# Altium PCB 9100带功放(AD).PcbDoc
Units mil, origin at the board's own origin, x right, y up, seen from the top; angles counter-clockwise.
Board outline 730 x 850 mil, 2 copper layers (Top Layer, Bottom Layer); 19 components, 27 nets, 86 pads, 27 vias.
Unrouted connection lines stored in the file: 2.
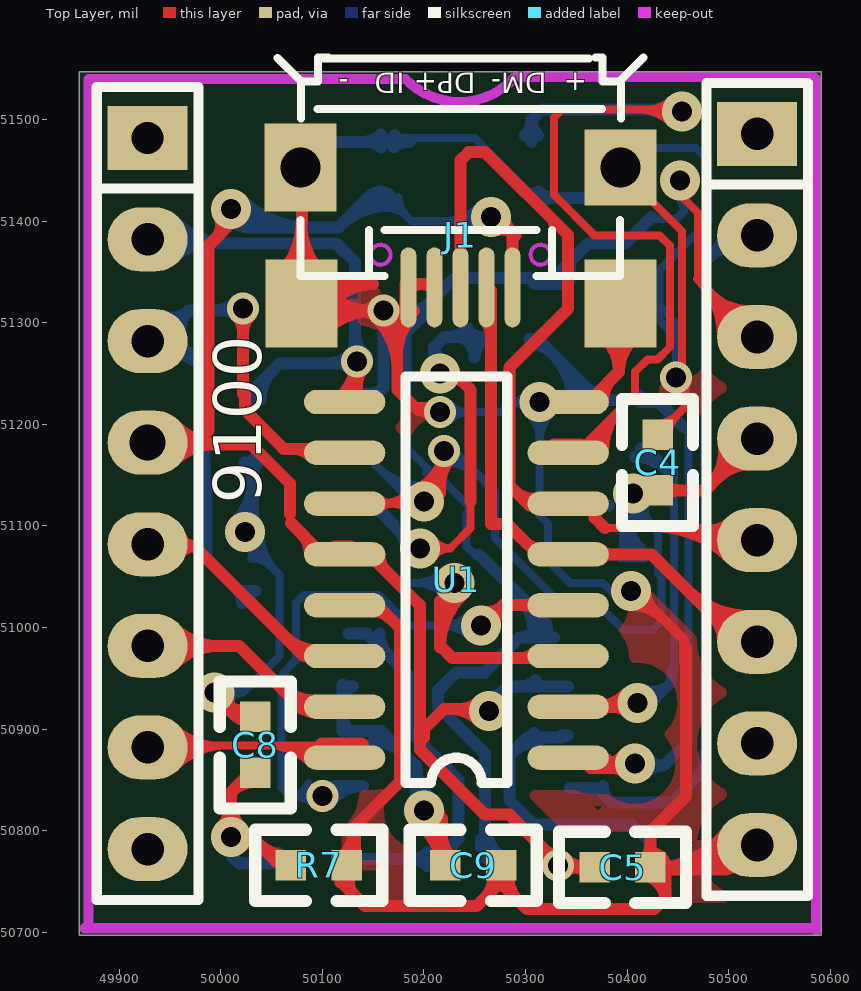
[diagram p0: Top Layer view]
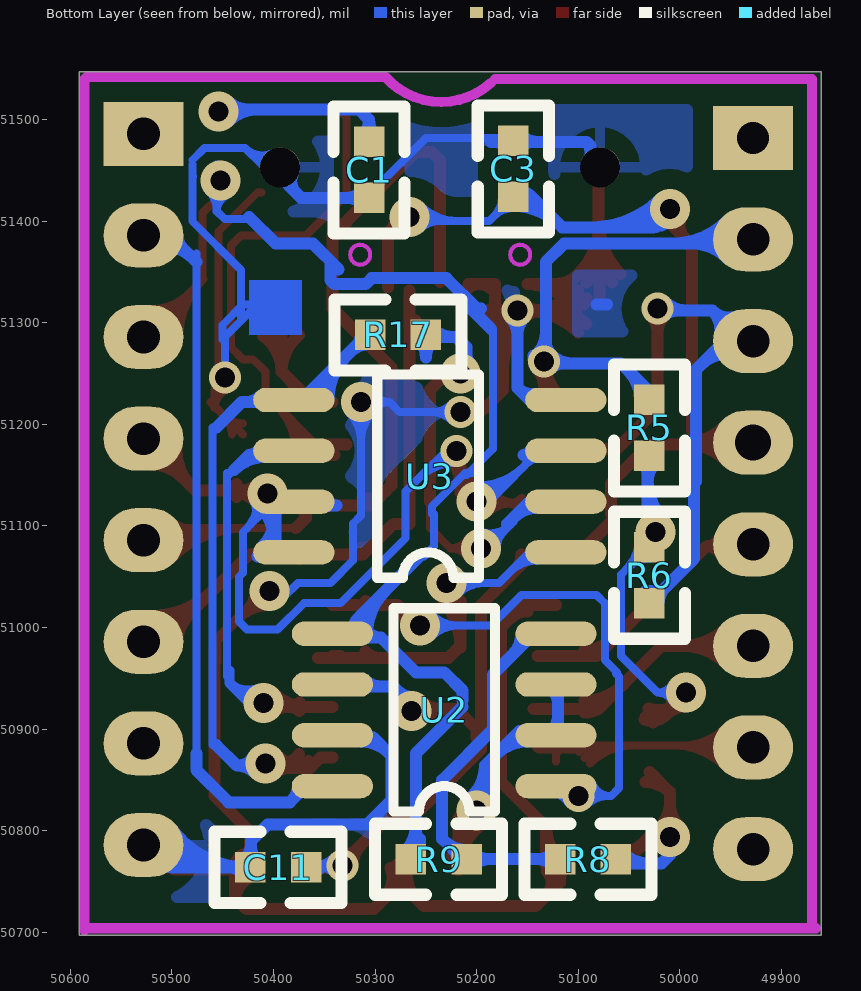
[diagram p1: Bottom Layer view, seen from below]

## Layer stack, top to bottom
Top Layer: signal copper 1.4
Dielectric: dielectric 12.6, FR-4, Dk 4.8
Bottom Layer: signal copper 1.4

## Board outline
49861,50697 50591,50697 50591,51547 49861,51547

## Design rules (kind name [scope] priority, off if disabled: settings)
Clearance [All] p1: gap=19.68
PolygonConnect [All] p1: connectstyle=Relief reliefconductorwidth=10 reliefentries=4 polygonreliefangle="90 Angle"
RoutingPriority [All] p1: routingpriority=4
RoutingVias [All] p1: holewidth=20 width=50 viastyle="Through Hole" minholewidth=28 minwidth=50 maxholewidth=28 maxwidth=50
SilkscreenOverComponentPads [All] p1: minsilkscreentomaskgap=10
SolderMaskExpansion [All] p1: expansion=4
Width [All] p1: maxlimit=78.74 minlimit=78.74 preferedwidth=10
26 further rules are at their usual default settings.

## Components (designator, comment, footprint, x,y, rotation, side; value= is the part's Value field where it differs from the comment)
C1 "105" 0603 50306,51478 r270 bottom
C3 "105" 0603 50164,51424 r90 bottom
C4 "104" 0603 50430,51190 r270 top
C5 "106" 0603 50368,50764 r0 top
C8 "105" 0603 50034,50912 r270 top
C9 "105" 0603 50276,50766 r180 top
C11 "104" 0603 50423,50764 r180 bottom
J1 "USB" USB-ANZUO 50236,51386 r0 top
R5 "4K7" 0603 50030,51224 r270 bottom
R6 "4K7" 0603 50030,51024 r90 bottom
R7 "10K" 0603 50124,50766 r180 top
R8 "4K7" 0603 50118,50772 r180 bottom
R9 "22k" 0603 50210,50772 r0 bottom
R17 "100R" 0603 50250,51288 r0 bottom
U1 "" SO-16 50342,50872 r180 top
U2 "8002" SO-8 50122,50844 r0 bottom
U3 "25q32" SOP8S 50380,51224 r180 bottom
? "" SIP8#1 49928,51482 r270 top locked
? "" SIP8#2 50528,51486 r270 top locked

## Footprints (in the part's own frame and the unit in brackets; to place one, negate y for a bottom-side part, rotate by r counter-clockwise, add the part's x,y. Pads: shape width x height; smd on the part's side, far side on the other; paste and mask are expansions set on the pad)
0603 [mil]
  rect 30x30 smd: 1(0,0) 2(55,0)
  silkscreen extent -35,-35 90,35
SIP8#1 [mm]
  rect 1.6x2 hole 0.8: 9(0,0)
  oval 1.6x2 hole 0.813: 10(2.54,0) 11(5.08,0) 13(10.16,0) 14(12.7,0) 15(15.24,0) 16(17.78,0)
  oval 1.6x2 hole 0.9: 12(7.62,0)
  silkscreen extent -1.27,-1.27 19.05,1.27
SIP8#2 [mm]
  oval 1.6x2 hole 0.813: 1(17.78,0) 2(15.24,0) 3(12.7,0) 4(10.16,0) 5(7.62,0) 6(5.08,0) 7(2.54,0)
  rect 1.6x2 hole 0.813: 8(0,0)
  silkscreen extent -1.27,-1.27 19.05,1.27
SO-8 [mil]
  oval 80x24 smd: 1(0,0) 2(0,-50) 3(0,-100) 4(0,-150) 5(220,-150) 6(220,-100) 7(220,-50) 8(220,0)
  silkscreen extent 60,-175 160,25
SO-16 [mil]
  oval 80x24 smd: 1(0,0) 2(0,-50) 3(0,-100) 4(0,-150) 5(0,-200) 6(0,-250) 7(0,-300) 8(0,-350) 9(220,-350) 10(220,-300) 11(220,-250) 12(220,-200) 13(220,-150) 14(220,-100) 15(220,-50) 16(220,0)
  silkscreen extent 60,-375 160,25
SOP8S [mil]
  round 39.37 on Bottom Overlay: 0(153.54,-124.02)
  oval 80x24 smd: 1(267.72,-150) 2(267.72,-100) 3(267.72,-50) 4(267.72,0) 5(0,0) 6(0,-50) 7(0,-100) 8(0,-150)
  silkscreen extent 82,-175 182,25
USB-ANZUO [mm]
  rect 1.8x2.2 smd: 0(-4,1.702) 0(-3.981,-1.702) 0(3.995,-1.702)
  rect 1.8x1.9 smd: 0(4,1.702)
  round 1 hole 1: 1(-4,1.702) 2(4,1.702)
  oval 0.4x2 smd: 1(-1.3,-1.298) 2(-0.65,-1.298) 3(0,-1.298) 4(0.65,-1.298) 5(1.3,-1.298)
  Keep-Out Layer circle w0.102: c2,-0.483 r0.25
  Keep-Out Layer circle w0.102: c-2,-0.483 r0.25
  silkscreen extent -4.57,-1.01 4.57,4.45

## Via types
v1: diameter 39.37, hole 19.68, Top Layer to Bottom Layer, 19 vias
v2: diameter 31.5, hole 19.68, Top Layer to Bottom Layer, 8 vias

## Nets (pads, with @x,y where several pads share a name; then routed paths per layer and width w, separated by ;. In a path a pad name is that pad's centre, name@x,y a point inside that pad or via, vN(x,y) a via of type N, cw(c..) or ccw(c..) an arc to the next point about the centre after c; other vN are vias at no path point)
AGND: 
DACL: ?.10 R5.1 U1.9 | length 955.7
  Top Layer w11.81: U1.9@50117.69,51226.31 ccw(c50078.32,51265.68) v2@50134,51265.68 ; U1.9@50118,51222 50134,51238 ; U1.9 U1.9@50130,51222 ; U1.9@50122,51228 U1.9@50126,51228 ; U1.9@50126.04,51217.96 ccw(c50106.83,51237.17) 50134,51237.17 ; v2@50127.04,51255.04 cw(c50110.24,51238.24) 50134,51238.24 cw(c50157.76,51238.24) v2@50140.96,51255.04 ; U1.9@50128.08,51222.37 cw(c50148.38,51223.62) 50134,51238 ; v2@50134,51270 50134,51238
  Bottom Layer w11.81: ?.10@49926,51378 50114,51378 50132,51360 50132,51268 v2@50126,51262 ; ?.10@49945.62,51391.74 ccw(c49978.8,51424.92) 49978.8,51378 ; ?.10@49953.97,51363.9 cw(c49988,51329.88) 49988,51378 ; ?.10@49953.97,51400.09 ccw(c50007.31,51453.44) 50007.31,51378 ; R5.1 50030,51232 50058,51260 50140,51260 50144,51264 v2@50144,51268 ; R5.1@50032,51224 R5.1@50036,51224 ; R5.1@50039.1,51224 cw(c50080.36,51224) 50051.18,51253.18 ; 50105.41,51260 ccw(c50105.41,51290.59) v2@50127.04,51268.96 ; 50115.07,51260 cw(c50115.07,51243.07) v2@50127.04,51255.04 ; v2@50132,51264 50132,51298 ; v2@50127.04,51268.96 ccw(c50115.07,51280.93) 50132,51280.93 cw(c50115.07,51280.93) v2@50127.04,51268.96 ; 50132,51290.59 ccw(c50162.59,51290.59) 50140.96,51268.96 cw(c50162.59,51290.59) 50132,51290.59
  other v2: 50134,51262
DACR: ?.11 R6.1 U1.10 | length 827.5
  Top Layer w11.81: v2@50015.04,51307.04 cw(c49998.24,51290.24) 50022,51290.24 cw(c50045.76,51290.24) v2@50028.96,51307.04 ; v2@50020,51308 50022,51306 50022,51230 ; 50024,51230 50024,51214 50062,51176 U1.10@50122,51176 ; 50069.63,51176 cw(c50069.63,51147.63) U1.10@50089.69,51167.69
  Bottom Layer w11.81: ?.11 49938,51282 49968,51312 ; ?.11@49939.59,51268.73 cw(c49950.7,51229.13) 49979.79,51258.21 ; ?.11@49943.92,51306.29 ccw(c49951.33,51328.66) 49968,51312 ; ?.11@49956,51282 49984,51254 49984,51144 ; ?.11@49960.86,51287.53 cw(c49986.74,51293.25) 49968,51312 ; 49986,51144 49986,51068 50018,51036 R6.1@50034,51036 ; 49993.41,51312 ccw(c49993.41,51342.59) v2@50015.04,51320.96 ; 50003.07,51312 cw(c50003.07,51295.07) v2@50015.04,51307.04 ; 50014.47,51039.52 ccw(c50030,51055.05) R6.1@50030,51033.09 ; 50014.47,51039.53 cw(c49998.95,51024) R6.1@50020.9,51024 ; v2@50020,51312 49968,51312
  other v2: 50022,51314
GND: ?.1 C1.2 C3.2 C4.1 C5.2 C9.1 C11.1 J1.0@50078.52,51453 J1.0@50079.28,51319 J1.0@50393.28,51319 J1.1 J1.2 R7.1 U1.8 U1.13 U2.7 U3.4 | length 5844.9
  Top Layer w7.87: v2@50206.15,51205.47 ccw(c50194,51197.42) 50194,51212 ; v2@50206.15,51218.53 cw(c50194,51226.58) 50194,51212 ; v2(50216,51212) 50194,51212 ; C4.1 50462,51222 ; C4.1@50430,51201.06 ccw(c50430,51227.77) 50448.89,51208.89 ccw(c50467.77,51190) C4.1@50441.06,51190 ; v2@50444.42,51234.74 cw(c50438.53,51216.24) 50457.95,51216.24 ; v2@50446.81,51242.25 cw(c50441.96,51227.01) 50457.95,51227.01 ; v2(50448,51246) 50448,51244 50457.95,51234.05 50457.95,51217.95 ; v2@50454,51242 50454,51278
  Top Layer w10: v1@50404,51021.31 cw(c50404,50976.21) 50435.9,51008.1 ; v1@50412,51032 50456,50988 50456,50966 ; v1@50418.69,51036 ccw(c50444.48,51036) 50426.24,51017.76
  Top Layer w11.81: J1.0@50058.48,51347.84 ccw(c50008.96,51397.76) 50079.28,51397.76 ; J1.0@50066.8,51339.46 ccw(c50037.09,51369.41) 50079.28,51369.41 ccw(c50121.46,51369.41) J1.0@50091.75,51339.46 ; J1.0@50079.28,51319 50079.28,51397.76 ; 50080,51398 J1.0@50080,51432 ; J1.0@50091.8,51298.6 cw(c50124.15,51266.26) 50124.15,51312 ; J1.0@50091.8,51323.66 ccw(c50119.95,51351.8) 50119.95,51312 ; J1.0@50094.58,51317.96 cw(c50129.45,51297.65) 50129.45,51338 ; J1.0@50100.07,51347.84 cw(c50149.59,51397.76) 50079.28,51397.76 ; J1.0@50100.16,51290.25 cw(c50152.66,51237.74) v2@50152.66,51312 ; J1.0@50100.15,51332.01 ccw(c50148.46,51380.31) v2@50148.46,51312 ; J1.0@50100.15,51347.76 ccw(c50123.71,51371.31) 50123.71,51338 ; J1.0@50101.44,51346.39 ccw(c50120,51362.72) 50120,51338 ; J1.0@50104.79,51312.02 cw(c50150,51285.68) 50150,51338 50120,51338 ; J1.0@50107.51,51319.76 ccw(c50118,51322.96) 50118,51312 ; J1.0@50107.96,51304.12 cw(c50118,51301.66) 50118,51312 ; J1.0@50108.8,51326.82 cw(c50120,51326.8) 50120,51338 ; R7.1@50117.97,50772.8 ccw(c50090.32,50804) 50132,50804 ; 50118,50748.91 cw(c50126.12,50748.91) R7.1@50125.12,50756.97 ; R7.1@50118,50772 50118,50750 50142,50726 50252,50726 50272,50746 50272,50758 C9.1@50270,50760 ; R7.1@50122.02,50767.86 ccw(c50133.68,50756.93) 50122.38,50745.62 ; U1.13 50154,51022 50176.32,50999.68 50176.32,50848.32 50132,50804 ; R7.1@50130.63,50759.78 ccw(c50142.58,50748.58) 50131,50737 ; R7.1@50132,50766 50132,50804 ; U1.13@50150,51015.91 cw(c50150,50991.54) 50167.23,51008.77 ; v2@50153.04,51318.96 cw(c50136.24,51335.76) 50136.24,51312 cw(c50136.24,51288.24) 50153.04,51305.04 cw(c50102.44,51254.44) 50174,51254.44 ; v2(50160,51312) 50118,51312 ; v2@50161.39,51313.39 cw(c50130.95,51282.95) 50174,51282.95 ; 50174,51272.52 cw(c50215.69,51272.52) J1.1@50186.21,51302 ; 50174,51301.03 cw(c50187.18,51301.03) J1.1@50177.86,51310.35 ; 50176.21,51310.21 cw(c50184.08,51302.34) J1.1@50190.49,51311.43 ; J1.1@50186.21,51333.49 cw(c50197.09,51322.61) 50197.09,51338 ; 50198.14,51338 cw(c50198.14,51322.61) J1.2@50209.02,51333.49 ; v2@50207.48,51207.07 ccw(c50192,51198.12) 50192,51216 ; J1.2@50208,51338 50182,51338 50182,51316 50174,51308 50174,51234 50192,51216 ; v2@50210,51216 50192,51216 ; 50260,50734 ccw(c50239.26,50754.74) C9.1@50267.3,50763.33 ; C9.1@50269.85,50759.29 cw(c50261.22,50749.88) 50274,50749.88 cw(c50282.17,50749.88) C9.1@50279.25,50757.51 ; 50272,50745.6 cw(c50285.33,50745.6) C9.1@50279.78,50757.73 ; C9.1@50273.42,50766.84 ccw(c50293.48,50760.35) 50278.57,50745.43 ; 50273.89,50747.89 ccw(c50260.52,50761.26) C9.1@50278.6,50766.8 ; C9.1@50274,50764 50274,50750 50301.22,50722.78 50426.78,50722.78 50438,50734 50438,50766 ; C9.1@50284.65,50763.2 ccw(c50314.11,50753.67) 50292.22,50731.78 ; U1.8 50362,51222 U1.8@50364,51224 ; U1.8@50368,51228 50392,51252 ; J1.0@50374.72,51288.16 cw(c50345.5,51251.99) 50392,51251.99 ; U1.8@50376.09,51222 cw(c50410.12,51222) 50386.06,51246.06 ; 50392,51274.67 cw(c50418.79,51274.67) J1.0@50403.43,51296.61 ; J1.0@50392,51316 50392,51252 ; J1.0@50393.28,51319 J1.0@50417,51319 ; J1.0@50410.2,51286.93 ccw(c50434.65,51251.99) 50392,51251.99 ; C5.2@50416.57,50770.43 ccw(c50401.04,50785.96) 50423,50785.96 ccw(c50444.96,50785.96) 50429.43,50770.43 ccw(c50449.78,50790.78) 50449.78,50762 ; C5.2@50419,50770 C5.2@50422,50770 ; C5.2@50420.1,50755.38 cw(c50411.7,50730.46) 50438,50730.46 ; C5.2 50423,50799 50458,50834 50458,50980 ; C5.2@50423.87,50766.57 cw(c50417.24,50746.9) 50438,50746.9 ; C5.2@50427.64,50777.77 cw(c50422.78,50763.34) C5.2@50438,50763.34 ; C5.2@50429.43,50757.57 cw(c50440.13,50746.87) 50440.13,50762 ; 50445.37,50762 ccw(c50445.37,50841.06) ?.1@50509.03,50794.17 ; 50468.74,50762 ccw(c50468.74,50823.85) ?.1@50518.54,50787.17 ; 50492.11,50762 ccw(c50492.11,50806.63) ?.1@50528.05,50780.16 ; ?.1@50499.52,50801.18 cw(c50422,50858.28) 50422,50762 50498,50762 50514,50778 50520,50778 ?.1 ; ?.1@50526,50784 ?.1@50526,50788 ; 50118,51312 50108,51302 50102,51302 50102,51320 50120,51338
  Bottom Layer w7.87: C3.2@50160,51478 50164,51482 50250,51482 50302.57,51429.43 C1.2@50312.43,51429.43 ; v2@50222,51212 50276,51212 50286,51222 ; v2@50224.35,51203.65 cw(c50244.51,51183.49) 50244.51,51212 cw(c50244.51,51240.51) v2@50224.35,51220.35 ; v1@50300.54,51213.82 ccw(c50286,51204.98) 50286,51222 ; v1@50300.54,51230.18 cw(c50286,51239.02) 50286,51222 ; v1@50302.86,51210.86 cw(c50275.98,51183.98) 50314,51183.98 cw(c50352.02,51183.98) v1@50325.14,51210.86 ; J1.2@50392,51456 50412,51456 50428,51472 ; J1.2@50396.86,51460.11 ccw(c50405.65,51478.57) 50420.11,51464.11 ; J1.2@50400.25,51467.22 ccw(c50410.74,51489.26) 50428,51472 ; v1@50404,51030 50390,51030 50376,51044 50344,51044 50322,51066 50322,51102.28 50314,51110.28 v1(50314,51222) 50286,51222 ; v2@50448,51250 50448,51272 ; 50480,51442 50480,51456 ; 50480,51460 50468,51472 50428,51472
  Bottom Layer w11.81: 50072,51318 50082,51318 ; 50088,51474 50092,51478 ; J1.1@50090.11,51460.44 cw(c50101.95,51468.05) 50092,51478 ; U3.4@50100,51220 U3.4@50136,51220 ; U3.4@50118,51222 50146,51222 50160,51236 ; 50139.63,51478 ccw(c50139.63,51503.37) C3.2@50157.57,51485.43 ; U3.4@50141.29,51230.01 ccw(c50144.83,51251.17) 50160,51236 ; 50144.46,51478 cw(c50144.46,51459.46) C3.2@50157.57,51472.57 ; v2@50153.04,51305.04 cw(c50136.24,51288.24) 50160,51288.24 cw(c50183.76,51288.24) v2@50166.96,51305.04 ; v2@50158,51312 50160,51310 50160,51236 ; C3.2@50170.43,51472.57 cw(c50183.54,51459.46) 50183.54,51478 ; C3.2@50170.89,51484.93 ccw(c50186,51497.92) 50186,51478 50092,51478 ; 50286.53,50876.52 cw(c50314,50849.05) U2.7@50314,50887.9 ; 50297,50887 cw(c50305.08,50878.92) U2.7@50310.9,50888.75 ; C1.2 50373,51423 50398,51448 J1.2@50398,51456 ; U2.7@50308.35,50896.28 cw(c50302,50898.85) 50302,50892 ; C1.2@50312.43,51416.57 cw(c50327.96,51401.04) 50327.96,51423 cw(c50327.96,51444.96) C1.2@50312.43,51429.43 ; U2.7@50336,50892 50302,50892 ; U2.7@50336,50894 U2.7 ; 50377.76,51427.76 ccw(c50365.79,51439.73) J1.2@50381.05,51447.04 ; C11.1@50416.57,50770.43 ccw(c50403.46,50783.54) 50422,50783.54 ; C11.1@50422,50766 50422,50790 50406,50806 50308,50806 50284,50830 50284,50874 50302,50892 ; 50422,50788.37 ccw(c50447.37,50788.37) 50429.43,50770.43 ccw(c50444.96,50785.96) 50444.96,50764 ccw(c50444.96,50742.04) C11.1@50429.43,50757.57 ; 50449.36,50764 ccw(c50449.36,50838.08) ?.1@50509.03,50794.17 ; 50472.72,50764 ccw(c50472.72,50820.89) ?.1@50518.54,50787.17 ; 50496.08,50764 ccw(c50496.08,50803.7) ?.1@50528.05,50780.17 ; ?.1@50499.52,50801.17 cw(c50426,50855.28) 50426,50764 50500,50764 50520,50784 ?.1@50520,50788
  other v1: 50404,51036
MCU_1LINE: ?.15 U1.16 | length 548.5
  Top Layer w7.87: ?.15@49930,50884 50114,50884 50122,50876 U1.16@50122,50868 ; ?.15@49944.23,50873.65 cw(c49969.22,50848.66) 49969.22,50884 ; ?.15@49949.79,50868.08 cw(c49988.23,50829.65) 49988.23,50884 ; ?.15@49949.79,50895.92 ccw(c49978.57,50924.69) 49978.57,50884 ; ?.15@49955.36,50862.51 cw(c50007.24,50810.64) 50007.24,50884 ; ?.15@49955.36,50901.49 ccw(c49997.58,50943.7) 49997.58,50884 ; 50045.56,50884 cw(c50045.56,50823.56) U1.16@50088.3,50866.3 ; 50064.57,50884 cw(c50064.57,50842.57) U1.16@50093.87,50871.87 ; 50083.58,50884 cw(c50083.58,50861.58) U1.16@50099.43,50877.43 ; U1.16@50102.59,50884 cw(c50102.59,50880.59) U1.16@50105,50883
  Top Layer w15.75: 50100,50884 50138,50884
MUTE: U1.4 U2.1 | length 805.8
  Top Layer w11.81: v1@50258.2,51015.6 ccw(c50261.85,51038.15) 50278,51022 ; v1@50264,51008 50278,51022 ; v1@50269.78,51002.05 cw(c50297.84,51002.15) 50278,51022 ; U1.4@50309.69,51017.69 ccw(c50299.29,51007.29) 50299.29,51022 ccw(c50299.29,51036.71) U1.4@50309.69,51026.31 ; U1.4 50278,51022
  Bottom Layer w7.87: 50062,50956 50074,50968 50074,51024 50082,51032 50156,51032 50186,51002 v1@50254,51002 ; 50063.14,50954.86 50060,50951.73 50060,50842 50068,50834 ; 50079.33,50834 ccw(c50079.33,50849.46) U2.1@50093.82,50844.07 ; U2.1@50086.44,50846.81 cw(c50068,50853.68) 50068,50834 ; v2@50091.65,50825.65 ccw(c50071.49,50805.49) 50071.49,50834 ccw(c50071.49,50862.51) U2.1@50091.65,50842.35 ; v2(50100,50834) 50068,50834 ; v1@50244.86,50990.86 ccw(c50217.98,50963.98) 50217.98,51002 ccw(c50217.98,51040.02) v1@50244.86,51013.14
  Bottom Layer w11.81: U2.1@50098.43,50835.19 cw(c50116.19,50821.7) U2.1@50116.19,50844 ; v2@50107.84,50828.05 cw(c50140,50803.61) 50140,50844 U2.1@50116,50844
  other v1: 50256,51002
NetC1_1: 
NetC9_2: C9.2 U2.2 U2.3 | length 544
  Top Layer w11.81: v1@50192.45,50808.47 cw(c50161.46,50761.18) C9.2@50218,50761.18 ; v1@50198.92,50818.35 cw(c50175.78,50783.04) 50218,50783.04 ; v1(50200,50820) 50210,50820 50218,50812 C9.2@50218,50764 ; v1@50205.39,50828.23 cw(c50190.11,50804.9) 50218,50804.9 ; C9.2@50214.57,50772.43 ccw(c50206.29,50780.71) C9.2@50218,50780.71 ; 50218,50795.2 ccw(c50250.2,50795.2) C9.2@50227.43,50772.43
  Bottom Layer w11.81: U2.2@50120,50898 U2.3@50120,50944 ; 50120,50913.54 ccw(c50141.54,50913.54) U2.2@50126.31,50898.31 ; 50120,50924.46 cw(c50141.54,50924.46) U2.3@50126.31,50939.69 ; U2.3@50120,50942 U2.3@50130,50942 ; U2.2@50128,50898 50158,50898 50192,50864 ; U2.2@50150,50887.9 cw(c50150,50844.22) 50180.89,50875.11 ; v1@50192,50824 50192,50864 ; 50192,50840.14 ccw(c50215.36,50840.14) v1@50201.19,50821.56 ; v1@50198,50822 v1(50200,50820) v1@50210,50820 ; v1@50208.36,50830.96 cw(c50233.55,50864) 50192,50864
NetR5_2: C8.1 R5.2 R6.2 | length 770.2
  Top Layer w11.81: v1@49990,50936 49992,50936 50016,50912 ; v1@49994,50922.22 cw(c49994,50893.78) 50014.11,50913.89 ; v1@50001,50927 ccw(c50020.95,50946.95) C8.1@50030.82,50920.52 ; v1@50007.67,50934.31 ccw(c50033.15,50931.15) 50015,50913 ; 50013.99,50914.01 ccw(c50028.01,50928.03) C8.1@50034.95,50909.46 ; C8.1@50026.68,50906.6 ccw(c50016,50898.74) 50016,50912 ; C8.1@50026.68,50917.4 cw(c50016,50925.26) 50016,50912 ; C8.1 50016,50912
  Bottom Layer w7.87: v1(49994,50936) 50022,50936 ; v1@50007.46,50927.82 cw(c50022,50918.98) 50022,50936 ; v1@50007.46,50944.18 ccw(c50022,50953.02) 50022,50936 ; R6.2@50024,51078.25 cw(c50024,51059.55) R6.2@50037.23,51072.77 ; R6.2@50026,51084 50058,51052 50058,50972 50022,50936 ; R6.2@50028,51084 R6.2@50028,51086 ; R6.2@50030,51067.94 cw(c50030,51038.81) 50050.59,51059.41 ; R6.2@50031.86,51093.59 ccw(c50064.85,51091.86) R6.2@50041.49,51068.51 ; R6.2@50039.73,51093.18 ccw(c50088.61,51090.62) 50054,51056 ; R6.2@50041.06,51079 ccw(c50065.36,51079) 50048.18,51061.82
  Bottom Layer w11.81: v1@50014.26,51103.74 ccw(c49971.42,51146.58) 50032,51146.58 ; v1@50022.61,51095.39 ccw(c49999.93,51118.07) 50032,51118.07 ; R6.2@50023.57,51085.43 ccw(c50003.21,51105.78) v1@50032,51105.78 ; R5.2@50023.57,51162.57 cw(c50003.21,51142.21) 50032,51142.21 ; R6.2@50032,51076 R6.2@50034,51074 ; R6.2@50032,51086 R5.2@50032,51166 ; v1@50032,51096.13 ccw(c50047.13,51096.13) R6.2@50036.43,51085.43 ; 50032,51151.87 cw(c50047.13,51151.87) R5.2@50036.43,51162.57
  other v1: 50024,51094
NetR8_1: R8.1 R9.1 U2.4 | length 514.8
  Bottom Layer w11.81: R8.1 50214,50772 50234.01,50792.01 50234.01,50849.83 50184,50899.84 50184,50954 50144,50994 U2.4@50126,50994 ; R8.1@50124.43,50765.57 cw(c50139.96,50750.04) 50139.96,50772 cw(c50139.96,50793.96) R8.1@50124.43,50778.43 ; U2.4@50156.1,50994 ccw(c50185.29,50994) 50164.65,50973.35 ; R9.1@50203.57,50765.57 ccw(c50188.04,50750.04) 50188.04,50772 ccw(c50188.04,50793.96) R9.1@50203.57,50778.43 ; R9.1@50204,50766 50204,50770 R9.1@50206,50772 ; R9.1@50210,50781.1 ccw(c50210,50812.71) 50232.35,50790.35 ; R9.1@50219.09,50772 cw(c50231.39,50772) R9.1@50222.7,50780.7
NetR8_2: C8.2 R7.2 R8.2 | length 421.2
  Top Layer w11.81: v1@50000.26,50803.74 ccw(c49976.73,50827.27) 50010,50827.27 ccw(c50043.27,50827.27) v1@50019.74,50803.74 ; 50009.94,50837.94 cw(c50034,50813.88) C8.2@50034,50847.9 ; v1@50010,50788 50010,50838 C8.2@50030,50858 ; v1@50010.11,50792.03 cw(c50012.79,50746.02) 50045.39,50778.61 ; v1@50011.37,50792.59 cw(c50021.39,50782.31) 50031.54,50792.46 ; v1@50019.62,50784.13 cw(c50029.74,50773.74) 50040,50784 ; 50030,50794 50054,50770 R7.2@50062,50770 ; 50035.5,50788.5 ccw(c50067.89,50820.89) R7.2@50068.82,50775.09
  Bottom Layer w11.81: v1(50010,50794) 50010,50776 50018,50768 R8.2@50062,50768 ; 50031.39,50768 ccw(c50031.39,50803.61) R8.2@50056.57,50778.43
NetR9_2: 
NetU2_8: 
SPI_CLK: U1.2 U3.6 | length 544
  Top Layer w11.81: U1.2 v1@50392,50922 ; U1.2@50367.08,50922 ccw(c50367.08,50968.92) v1@50400.26,50935.74 ; U1.2@50374.31,50917.69 cw(c50384.71,50907.29) 50384.71,50922 cw(c50384.71,50936.71) U1.2@50374.31,50926.31 ; 50386.39,50922 cw(c50386.39,50902.39) v1@50400.26,50916.26
  Bottom Layer w7.87: 50436.63,51157.37 50446,51148 ; 50446,50952 50446,51152
  Bottom Layer w10: v1(50410,50926) 50424,50926 50443.5,50945.5 ; v1@50411.72,50930.36 ccw(c50418.89,50948.55) 50432.72,50934.72 ; v1@50415.39,50939.66 ccw(c50424.99,50964.01) 50443.5,50945.5 ; 50443.5,50957.5 50443.5,50945.5
  Bottom Layer w11.81: U3.6@50408,51167.9 cw(c50408,51124.22) 50438.89,51155.11 ; U3.6@50410.14,51168.29 cw(c50416.74,51150.74) 50430,51164 ; U3.6@50412,51170 50424,51170 ; U3.6@50413.5,51176.62 ccw(c50424,51181.63) 50424,51170 ; 50436.63,51157.37 50424,51170
SPI_CS: U1.3 U3.1 | length 593.5
  Top Layer w7.87: v1@50232,51042 v1@50232,51044
  Top Layer w11.81: 50216,50980.44 cw(c50288.82,50980.44) v1@50239.36,51033.89 ; 50216,51007.46 cw(c50263.81,51007.46) v1@50231.34,51042.55 ; v1@50218.71,51036.1 cw(c50213.53,51032.47) 50218,51028 cw(c50224.78,51021.22) v1@50226.92,51030.57 ; v1@50232,51042 50216,51026 50216,50982 50228,50970 U1.3@50356,50970 ; 50294.46,50970 ccw(c50294.46,50991.54) U1.3@50309.69,50976.31 ; U1.3@50334,50972 U1.3
  Bottom Layer w7.87: U3.1@50116,51074 50148,51074 50178,51044 v1@50236,51044 ; U3.1@50140.28,51065.94 cw(c50140.28,51027.84) 50167.22,51054.78 ; U3.1@50140.28,51073.81 cw(c50140.28,51054.73) 50153.78,51068.22 ; v1@50218.86,51032.86 ccw(c50191.98,51005.98) 50191.98,51044 ccw(c50191.98,51082.02) v1@50218.86,51055.14
  other v1: 50230,51044
SPI_DI: R17.1 U3.2 | length 711.8
  Top Layer w7.87: v1(50196,51078) 50226,51078 ; v1@50208.96,51069.06 cw(c50226,51057.3) 50226,51078 ; v1@50208.96,51086.94 ccw(c50226,51098.7) 50226,51078 ; 50246,51124 50246,51098 50226,51078
  Top Layer w11.81: v1@50214,51246 v1@50218,51242 ; v1(50216,51250) 50230,51250 50246,51234 50246,51160 ; v1@50216.45,51248.08 cw(c50221.76,51225.69) 50238.04,51241.96 ; 50246,51124 50246,51156
  Bottom Layer w7.87: 50164,51108 50164,51104 50188,51080 v1@50210,51080 ; 50167,51101 ccw(c50186.84,51120.84) v1@50192.71,51093.4 ; 50173.36,51094.64 cw(c50156.72,51078) v1@50180.25,51078 ; 50177.24,51090.76 ccw(c50190.45,51103.96) v1@50194.35,51085.7
  Bottom Layer w11.81: U3.2@50110,51126 U3.2@50128,51126 ; U3.2@50126,51122 50150,51122 50170,51102 ; U3.2@50140.28,51117.9 cw(c50140.28,51084.56) 50163.86,51108.14 ; v1@50206.26,51259.74 ccw(c50197.22,51268.78) 50210,51268.78 ; v1@50210,51252 50210,51276 ; v1@50219.68,51263.28 cw(c50223.2,51276) 50210,51276 ; 50223.21,51286 ccw(c50223.21,51314.78) R17.1@50243.57,51294.43 ; 50232.87,51286 cw(c50232.87,51270.87) 50243.57,51281.57 cw(c50228.04,51266.04) 50250,51266.04 cw(c50271.96,51266.04) R17.1@50256.43,51281.57 ; 50250,51266 R17.1 ; R17.1@50258,51286 50220,51286 50210,51276
SPI_DO: R17.2 U1.1 U3.5 | length 880.3
  Top Layer w11.81: U1.1 50354,50872 50364,50862 50402,50862 cw(c50402,50895.76) U1.1@50374.89,50875.63 ; U1.1@50365.08,50862 ccw(c50365.08,50908.92) v1@50398.26,50875.74 ; U1.1@50365.41,50868.59 ccw(c50378.52,50878.32) 50378.52,50862 ; 50384.39,50862 cw(c50384.39,50842.39) v1@50398.26,50856.26
  Bottom Layer w7.87: 50460.32,50884.32 50460.32,51196.86
  Bottom Layer w11.81: R17.2@50304,51284 50312,51284 50372,51224 U3.5@50386,51224 ; R17.2@50305,51278.9 cw(c50305,51249.71) 50325.65,51270.35 ; R17.2@50314.09,51288 ccw(c50328.81,51288) R17.2@50318.4,51277.6 ; 50327.45,51268.55 cw(c50282.91,51224) U3.5@50345.9,51224 ; 50347.62,51248.38 cw(c50323.23,51224) U3.5@50357.72,51224 ; U3.5@50367.78,51228.22 cw(c50363.56,51224) U3.5@50369.53,51224 ; U3.5@50388,51224 U3.5@50404,51224 ; v1@50410,50864 50436,50864 ; U3.5@50412,51222 50431.17,51222 50456.32,51196.86 ; U3.5@50412.31,51228.31 ccw(c50427.54,51243.54) 50427.54,51222 ; v1@50417.85,50856.36 cw(c50436,50838.61) 50436,50864 ; v1@50419.79,50873.14 ccw(c50436,50882.95) 50436,50864 ; 50456.32,50884.32 50436,50864
  other v1: 50408,50866
SPK1: ?.7 U2.8 | length 787.5
  Bottom Layer w7.87: 50476,50878 50476,51368
  Bottom Layer w11.81: U2.8@50344,50842 50370,50842 50384,50828 50444.16,50828 50476,50859.84 50476,50875.86 ; U2.8@50376.1,50844 ccw(c50395.64,50844) 50381.82,50830.18 ; 50476,51360 50502,51386 ?.7 ; 50480.51,51364.51 cw(c50504.99,51340.03) ?.7@50515.82,51372.91 ; 50489.26,51373.26 ccw(c50476.51,51386) ?.7@50494.54,51386
SPK2: ?.6 R9.2 U2.5 | length 1785.5
  Top Layer w7.87: v1@50452,51450 v1@50452,51456 ; v1@50454,51450 50454,51424 50470,51408 50470,51342 50518,51294 ?.6@50534,51294 ; 50468.93,51343.07 cw(c50411.85,51286) ?.6@50492.57,51286 ; 50482.37,51329.63 cw(c50438.74,51286) ?.6@50500.44,51286 ; 50483.11,51328.89 ccw(c50520.12,51365.91) ?.6@50520.12,51313.56 ; 50495.81,51316.19 cw(c50465.62,51286) ?.6@50508.31,51286 ; 50496.55,51315.45 ccw(c50520.12,51339.03) ?.6@50520.12,51305.69
  Top Layer w11.81: ?.6@50500,51290 ?.6@50532,51290
  Bottom Layer w7.87: 50184,51194 50184,51294 ; 50184,51200 50184,51176 50210,51150 ; 50202,51152 50211.4,51152 50244,51119.4 50244,51112 ; 50242,51112 50242,51080 50252,51070 ; 50424,51402 50448,51402 50456,51410 v1@50456,51456 ; v1@50445.66,51425.58 cw(c50438.68,51409.74) 50456,51409.74 ; 50456,51411.64 cw(c50480.36,51411.64) v1@50463.14,51428.86
  Bottom Layer w11.81: 50186,51294 50206,51314 50196,51314 ; 50200,51314 50230,51344 50303.39,51344 50309.39,51338 50340,51338 50344,51342 50344,51360.67 ; 50214,50922 50260,50876 50260,50792 ccw(c50272.14,50792) R9.2@50268.06,50780.57 ; 50214,50928 50214,50938 50232,50956 50260,50956 50294,50990 ; 50254,51072 50316,51010 ; 50260,50806.03 ccw(c50299.03,50806.03) R9.2@50271.43,50778.43 ; R9.2@50262,50772 50262,50778 50256,50784 50256,50792 ccw(c50267,50792) R9.2@50265.91,50781.05 ; 50290.87,51035.13 cw(c50249.74,50994) U2.5@50307.9,50994 ; 50307,51019 cw(c50295.04,51007.04) U2.5@50308.98,50997.45 ; U2.5@50309.1,50997.62 cw(c50294,51008.76) 50294,50990 ; U2.5@50310.39,50998.91 ccw(c50302.24,51010) 50316,51010 ; 50311.03,51014.97 cw(c50290.06,50994) U2.5@50319.72,50994 ; U2.5@50316,51000 50316,51010 ; 50317.04,51008.96 cw(c50306.94,50998.86) U2.5@50318.71,50990.76 ; U2.5@50328,50990 50294,50990 ; 50336,51352.67 50361.33,51378 50398,51378 50424,51404
  other v1: 50452,51440
UART_RX: ?.14 U1.15 | length 462.9
  Top Layer w11.81: ?.14 50018,50982 50080,50920 ; ?.14@49945.62,50972.26 cw(c49969.14,50948.73) 49969.14,50982 cw(c49969.14,51015.27) ?.14@49945.62,50991.74 ; ?.14@49953.97,50963.9 cw(c49997.65,50920.22) 49997.65,50982 cw(c49997.65,51043.78) ?.14@49953.97,51000.09 ; 50056.28,50943.72 ccw(c50094,50981.43) U1.15@50094,50928.1 ; 50076.45,50923.56 ccw(c50094,50941.11) U1.15@50094,50916.28 ; U1.15@50088.72,50925.04 cw(c50080,50930.06) 50080,50920 ; U1.15@50144,50920 50080,50920
UART_TX: ?.13 U1.14 | length 338.1
  Top Layer w11.81: ?.13@49926,51080 49974,51080 ; ?.13@49934,51080 ?.13@49934,51088 ; ?.13@49958.77,51070.58 cw(c49974,51062.99) 49974,51080 ; ?.13@49960.18,51090 ccw(c49974,51094.54) 49974,51080 ; 50063.11,50990.89 ccw(c50094,51021.78) U1.14@50094,50978.09 ; U1.14@50140,50972 50082,50972 49974,51080
USB_DM: ?.3 J1.4 U1.5 | length 782.4
  Top Layer w11.81: J1.4@50260.2,51302 cw(c50246.19,51287.99) 50266,51287.99 ; J1.4@50266,51331.59 50266,51102 50282,51102 50312,51072 50424,51072 50502,50994 ?.3@50532,50994 ; 50300.18,51083.82 ccw(c50314,51097.64) U1.5@50314,51078.1 ; U1.5@50374.31,51067.69 cw(c50384.71,51057.29) 50384.71,51072 cw(c50384.71,51086.71) U1.5@50374.31,51076.31 ; 50459.15,51036.85 ccw(c50520.12,51097.82) ?.3@50520.12,51011.59 ; 50479.32,51016.68 ccw(c50520.12,51057.49) ?.3@50520.12,50999.78 ; 50483.6,51012.4 cw(c50457.2,50986) ?.3@50494.53,50986 ; ?.3@50500,50986 ?.3@50534,50986 ; ?.3@50522,50992 50526,50988 ?.3@50528,50988 ; ?.3@50538,50988 ?.3@50542,50988
USB_DP: ?.4 J1.3 U1.6 | length 1123.8
  Top Layer w7.87: 50378.22,51097.78 ?.4@50500.22,51097.78 ; 50425.15,51097.78 cw(c50425.15,50991.03) ?.4@50500.64,51066.51 ; 50444.16,51097.78 cw(c50444.16,51010.04) ?.4@50506.21,51072.08 ; 50463.17,51097.78 cw(c50463.17,51029.05) ?.4@50511.77,51077.65 ; 50482.03,51097.78 ccw(c50482.03,51124.1) ?.4@50500.64,51105.49 ; 50482.18,51097.78 cw(c50482.18,51048.06) ?.4@50517.34,51083.22
  Top Layer w11.81: J1.3@50236,51340 50236,51460 50244,51468 50260.16,51468 50342,51386.16 50342,51314 50284,51256 50284,51140 50304,51120 50364,51120 U1.6@50368,51116 ; 50290,51134 ccw(c50306.56,51150.56) U1.6@50312.46,51127.9 ; 50328,51398 50328,51400.16 ; 50368,51107.86 cw(c50378.31,51107.86) U1.6@50373.09,51116.74 ; U1.6@50368,51118 50368,51108 50378.22,51097.78 ; ?.4@50500.22,51097.78 50516,51082 ?.4@50526,51082 ; ?.4@50520,51090 ?.4@50534,51090
V3.3: ?.5 C4.2 U1.11 U3.3 U3.7 U3.8 | length 2059.7
  Top Layer w7.87: U1.11@50124,51122 50198,51122 v1(50200,51124) ; U1.11@50155.7,51116.3 cw(c50169.46,51102.53) 50169.46,51122 cw(c50169.46,51141.46) U1.11@50155.7,51127.7 ; U1.11@50157.15,51122 ccw(c50157.15,51166.85) v1@50188.86,51135.14 ; 50166.81,51122 cw(c50166.81,51090.81) v1@50188.86,51112.86 ; 50176.16,51122 ccw(c50176.16,51147.84) v1@50194.43,51129.57 ; v1@50193.59,51138.38 ccw(c50176.82,51176) 50218,51176 50218,51132 50210,51124 v1(50200,51124) ; v1@50196.79,51131.19 ccw(c50182.22,51163.87) v2@50218,51163.87 ; v1@50203.21,51116.81 ccw(c50193.04,51139.6) 50218,51139.6 ; v2@50211.65,51165.65 cw(c50196.31,51150.31) 50218,51150.31 ; 50218,51140.66 cw(c50253.34,51140.66) v2@50228.35,51165.65 ; 50218,51151.73 cw(c50187.63,51151.73) v1(50200,51124) ; v1@50410.53,51132 cw(c50410.53,51115.53) C4.2@50422.18,51127.18 ; C4.2@50420.35,51140.41 cw(c50406,51148.45) v1(50406,51132) C4.2@50426,51132 ; C4.2@50421.31,51128.31 cw(c50426,51127.17) C4.2@50426,51132 ; C4.2@50421.31,51135.69 ccw(c50426,51136.82) C4.2@50426,51132
  Top Layer w11.81: C4.2@50415.74,51122.26 cw(c50446.51,51091.49) 50446.51,51135 ; C4.2@50415.74,51141.74 ccw(c50432.02,51158.02) C4.2@50432.02,51135 ; C4.2@50416.3,51141.15 ccw(c50430,51153.32) C4.2 ; C4.2@50418.94,51127.27 cw(c50430,51123.23) C4.2 ; C4.2@50436.43,51128.57 cw(c50451.96,51113.04) 50451.96,51135 cw(c50451.96,51156.96) C4.2@50436.43,51141.43 ; 50480.94,51138.94 ccw(c50445.81,51174.06) ?.5@50494.86,51181.94 ; 50489.88,51147.88 cw(c50520.12,51117.64) ?.5@50520.12,51160.41 ; 50497.28,51155.29 ccw(c50473.98,51178.59) ?.5@50506.52,51183.81 ; ?.5@50522,51182 50522,51180 50477,51135 C4.2
  Bottom Layer w7.87: U3.3@50120,51172 50140,51172 50184,51128 v1@50204,51128 ; U3.3@50140.28,51165.94 cw(c50140.28,51151.99) 50150.15,51161.85 ; U3.3@50148.35,51174 ccw(c50173.33,51174) 50155.66,51156.34 ; 50152.63,51159.37 ccw(c50200,51206.74) v1@50200,51139.75 ; 50166.07,51145.93 ccw(c50200,51179.85) v1@50200,51131.87 ; 50179.52,51132.49 ccw(c50200,51152.97) v1(50200,51124) ; v2@50220,51162.19 cw(c50220,51109.53) 50257.23,51146.77 ; v2@50220,51170.06 cw(c50220,51136.42) 50243.79,51160.21 ; v2@50220,51178 50226,51178 50270,51134 50270,51088 50334,51024 50370,51024 50396,50998 50426,50998 50434,51006 50434,51050 50430.25,51053.75 50430.25,51093.75 50406,51118 U3.7@50406,51124 ; U3.7@50408.19,51123.99 ccw(c50426.29,51123.32) 50413.48,51110.52 ; U3.7@50412.91,51128.23 ccw(c50427.76,51120.15) 50415.81,51108.19 ; U3.7@50416.06,51123.7 ccw(c50450.92,51122.42) 50426.25,51097.75 ; U3.7@50419.83,51124.47 ccw(c50437.4,51114.89) 50423.25,51100.75
  Bottom Layer w11.81: U3.3@50136,51170 50154,51170 cw(c50154,51178.27) U3.3@50146.1,51175.81 ; U3.7@50346.22,51125.92 cw(c50338,51128.66) 50338,51120 U3.7@50382,51120 ; U3.8@50394,51070 U3.8@50416,51070 ; U3.8@50398,51072 U3.7@50398,51120 ; U3.8@50398,51079.42 cw(c50458.58,51079.42) U3.7@50415.74,51122.26 ; U3.8@50398,51084.34 ccw(c50418.34,51084.34) U3.8@50403.96,51069.96 ; U3.8@50398,51085.14 cw(c50446.86,51085.14) U3.7@50412.31,51119.69 ; 50398,51107.93 cw(c50430.07,51107.93) U3.7@50407.39,51130.61 ; U3.7@50398,51112.86 ccw(c50446.86,51112.86) U3.8@50412.31,51078.31 ; U3.7@50398,51113.66 cw(c50418.34,51113.66) U3.7@50403.96,51128.04 ; U3.8@50400,51076 U3.8@50412,51076 ; U3.7@50408,51122 U3.7@50408,51128
  other v2: 50220,51174
VCC: ?.12 C3.1 C5.1 C11.2 J1.5 U1.12 U2.6 | length 2670.6
  Top Layer w7.87: 50068,51126 50068,51104 50072,51100
  Top Layer w11.81: ?.12@49928,51180 50030,51180 50068,51142 50068,51112 ; ?.12@49934,51184 49978,51184 ; ?.12@49945.62,51191.74 ccw(c49973.97,51220.1) 49973.97,51180 ; ?.12@49953.97,51163.9 cw(c49992.83,51125.05) 49992.83,51180 ; ?.12@49953.97,51200.1 ccw(c50002.48,51248.61) 50002.48,51180 ; ?.12@49957.69,51195.37 ccw(c49978,51207.81) 49978,51184 ; ?.12@49959.33,51171.77 cw(c49978,51163.64) 49978,51184 ; 49995,51383 ccw(c49981.92,51396.08) v1@49998.01,51405.2 ; v1@50016,51410 50012,51406 50012,51400 49988,51376 49988,51194 49978,51184 ; 50069.12,51102.88 50098,51074 50144,51074 50196,51022 50196,50880 50260,50816 50284,50816 50336,50764 C5.1 ; 50079.35,51092.65 cw(c50058.71,51072) U1.12@50087.9,51072 ; U1.12@50112,51080 U1.12@50128,51080 ; U1.12@50156.09,51072 ccw(c50180.46,51072) 50163.23,51054.77 ; 50200,50892 50200,50900 50220,50920 v1@50272,50920 ; 50225.9,50920 cw(c50225.9,50879.9) v1@50254.26,50908.26 ; 50235.56,50920 ccw(c50235.56,50946.44) v1@50254.26,50927.74 ; v1@50260,51400 50276,51400 50287.18,51388.82 J1.5 ; v1@50270.04,51390.83 cw(c50275.95,51371.59) 50290.18,51385.82 ; v1@50279.78,51404 ccw(c50298.56,51404) 50285.28,51390.72 ; 50313.78,50786.22 cw(c50293.57,50766) v2@50322.16,50766 ; 50318.61,50781.39 ccw(c50332,50794.78) v2@50332,50775.84 ; v2@50338.96,50759.04 cw(c50350.93,50747.07) 50350.93,50764 ; v2@50338.96,50772.96 ccw(c50360.59,50794.59) C5.1@50360.59,50764 ; C5.1@50361.57,50757.57 ccw(c50346.04,50742.04) 50346.04,50764 ccw(c50346.04,50785.96) C5.1@50361.57,50770.43
  Bottom Layer w7.87: C3.1@50164,51412.94 cw(c50164,51386.23) 50182.89,51405.11 cw(c50201.77,51424) C3.1@50175.06,51424 ; C3.1 C3.1@50166,51424 ; C3.1@50166,51420 50168,51420 50188,51400 50266,51400 v1@50268,51402 ; 50218.32,51400 ccw(c50218.32,51451.68) v1@50254.86,51415.14 ; 50237.33,51400 ccw(c50237.33,51432.67) v1@50260.43,51409.57 ; 50237.64,51400 cw(c50237.64,51375.64) v1@50254.86,51392.86 ; v2(50332,50766) 50366,50766 C11.2@50370,50762 ; v2@50336.46,50766 cw(c50336.46,50732.46) C11.2@50360.18,50756.18 ; v2@50340.35,50757.65 cw(c50360.51,50737.49) 50360.51,50766 cw(c50360.51,50794.51) v2@50340.35,50774.35 ; v2@50346.12,50766 ccw(c50346.12,50785.88) C11.2@50360.18,50771.82
  Bottom Layer w11.81: v1@50003.04,51405.04 ccw(c50029.69,51431.69) 50029.69,51394 ; v1@50006,51414 50026,51394 50116,51394 50146,51424 ; v1@50011.39,51413.39 ccw(c50058.21,51460.21) 50058.21,51394 ; v1@50012.94,51398.54 cw(c50015.73,51385.73) 50025,51395 cw(c50032.54,51402.54) v1@50022.71,51406.67 ; v1@50019.74,51421.74 ccw(c50086.72,51488.72) 50086.72,51394 ; 50117.75,51395.75 cw(c50164,51349.49) C3.1@50164,51414.9 ; 50137,51415 cw(c50148.78,51403.22) C3.1@50158.63,51416.66 ; 50137.91,51415.91 cw(c50164,51389.82) C3.1@50164,51426.71 ; 50146.74,51424.74 cw(c50157.02,51414.46) C3.1@50165.6,51426.19 ; C3.1@50156.68,51418.6 ccw(c50146,51410.74) 50146,51424 ; C3.1@50156.68,51429.4 cw(c50146,51437.26) 50146,51424 ; C3.1 50146,51424 ; v1@50264,50931.78 ccw(c50264,50950.56) 50277.28,50937.28 ; v1@50266,50920 50266,50926 50282,50942 ; v1@50277.14,50922.14 cw(c50295.93,50928.07) 50282,50942 ; 50294.46,50942 ccw(c50294.46,50963.54) U2.6@50309.69,50948.31 ; U2.6@50342,50942 50282,50942
  other v1: 50264,50918 50266,51404 50010,51412
VCOM: C1.1 U1.7 | length 1091.3
  Top Layer w7.87: U1.7@50354,51176 50408,51230 50408,51252 50420,51264 50430,51264 50442,51276 50442,51376 50432,51386 50368,51386 50328,51426 50328,51502 50336,51510 v1@50450,51510 ; U1.7@50354.44,51172 cw(c50365.16,51172) U1.7@50357.58,51179.58 ; U1.7@50362,51176 U1.7@50362,51180 ; U1.7@50362.32,51172 cw(c50392.05,51172) 50371.02,51193.02 ; U1.7@50370.19,51172 cw(c50418.93,51172) 50384.46,51206.46 ; U1.7@50378.06,51172 cw(c50445.81,51172) 50397.91,51219.91 ; 50411.15,51510 cw(c50411.15,51465.15) v1@50442.86,51496.86 ; 50420.81,51510 ccw(c50420.81,51541.19) v1@50442.86,51519.14 ; 50430.16,51510 cw(c50430.16,51484.16) v1@50448.43,51502.43
  Top Layer w11.81: U1.7@50328,51180 U1.7@50354,51180 ; U1.7@50340,51170 U1.7@50360,51170
  Bottom Layer w11.81: C1.1@50299.57,51484.43 ccw(c50284.04,51499.96) 50306,51499.96 ccw(c50327.96,51499.96) C1.1@50312.43,51484.43 ; C1.1 50306,51500 50316,51510 50450,51510 v1@50452,51508 ; 50415.9,51510 cw(c50415.9,51469.9) v1@50444.26,51498.26 ; 50425.56,51510 ccw(c50425.56,51536.44) v1@50444.26,51517.74
  other v1: 50454,51508
VDD: 
pads on no net: ?.2 ?.8 ?.9 ?.16 J1.0@50393.48,51453 U3.0
copper on no net: | length 536
  Top Layer w7.87: 50412,51428 50416,51428 50454,51390 50454,51268.85
  Top Layer w11.81: 50080,51417.44 50080,51456
  Bottom Layer w7.87: 50432,51304 50432,51352 50480,51400 50480,51443.3 50479.26,51444.03 ; 50448,51269.62 50448,51286 50416,51318 50396,51318 50430,51318 50450,51298 50450,51283.64

## Polygon pours and split planes (outlines as drawn)
GND on Top Layer "Top Layer-GND" (hatched 90Degree grid 8.19 track 11.93, remove dead copper, pour order 1000): 0,0
GND on Top Layer "Top Layer-GND 1" (hatched 90Degree grid 8.19 track 11.93, remove dead copper, pour order 1001): 0,0
GND on Top Layer "Top Layer-GND 2" (hatched 90Degree grid 8.19 track 11.93, remove dead copper, pour order 1002): 0,0
GND on Bottom Layer "Bottom Layer-GND" (hatched 90Degree grid 8.19 track 11.93, remove dead copper, pour order 1003): 0,0
GND on Bottom Layer "Bottom Layer-GND 1" (hatched 90Degree grid 8.19 track 11.93, remove dead copper, pour order 1004): 0,0
GND on Bottom Layer "Bottom Layer-GND 2" (hatched 90Degree grid 8.19 track 11.93, remove dead copper, pour order 1005): 0,0

## Keep-outs
Keep-Out Layer:
  lines w10: 49866,50704 50584,50704 50586,50702 50586,51540 ; 49870,50704 49870,51540 50182,51540 ; 50186,51536 ccw(c50235,51591) 50290,51542 50584,51542

## Other copper
Bottom Layer:
  rectangle: 50372,51288 50424,51342

## Silkscreen, mask and mechanical layers (free items; w line width, h text height)
Top Overlay:
  text "9100" at 50040,51122 h47.24 r90

## Text inside footprints (layer, text, board x,y; h text height)
J1: Top Overlay "+" at 50361,51546.11 h20 r180; Top Overlay "DM-" at 50321,51546.11 h20 r180; Top Overlay "DP+" at 50251,51546.11 h20 r180; Top Overlay "ID" at 50181,51546.11 h20 r180; Top Overlay "-" at 50126,51546.11 h20 r180